# EAGLE board fonteV2 (EAGLE 9.6.2)
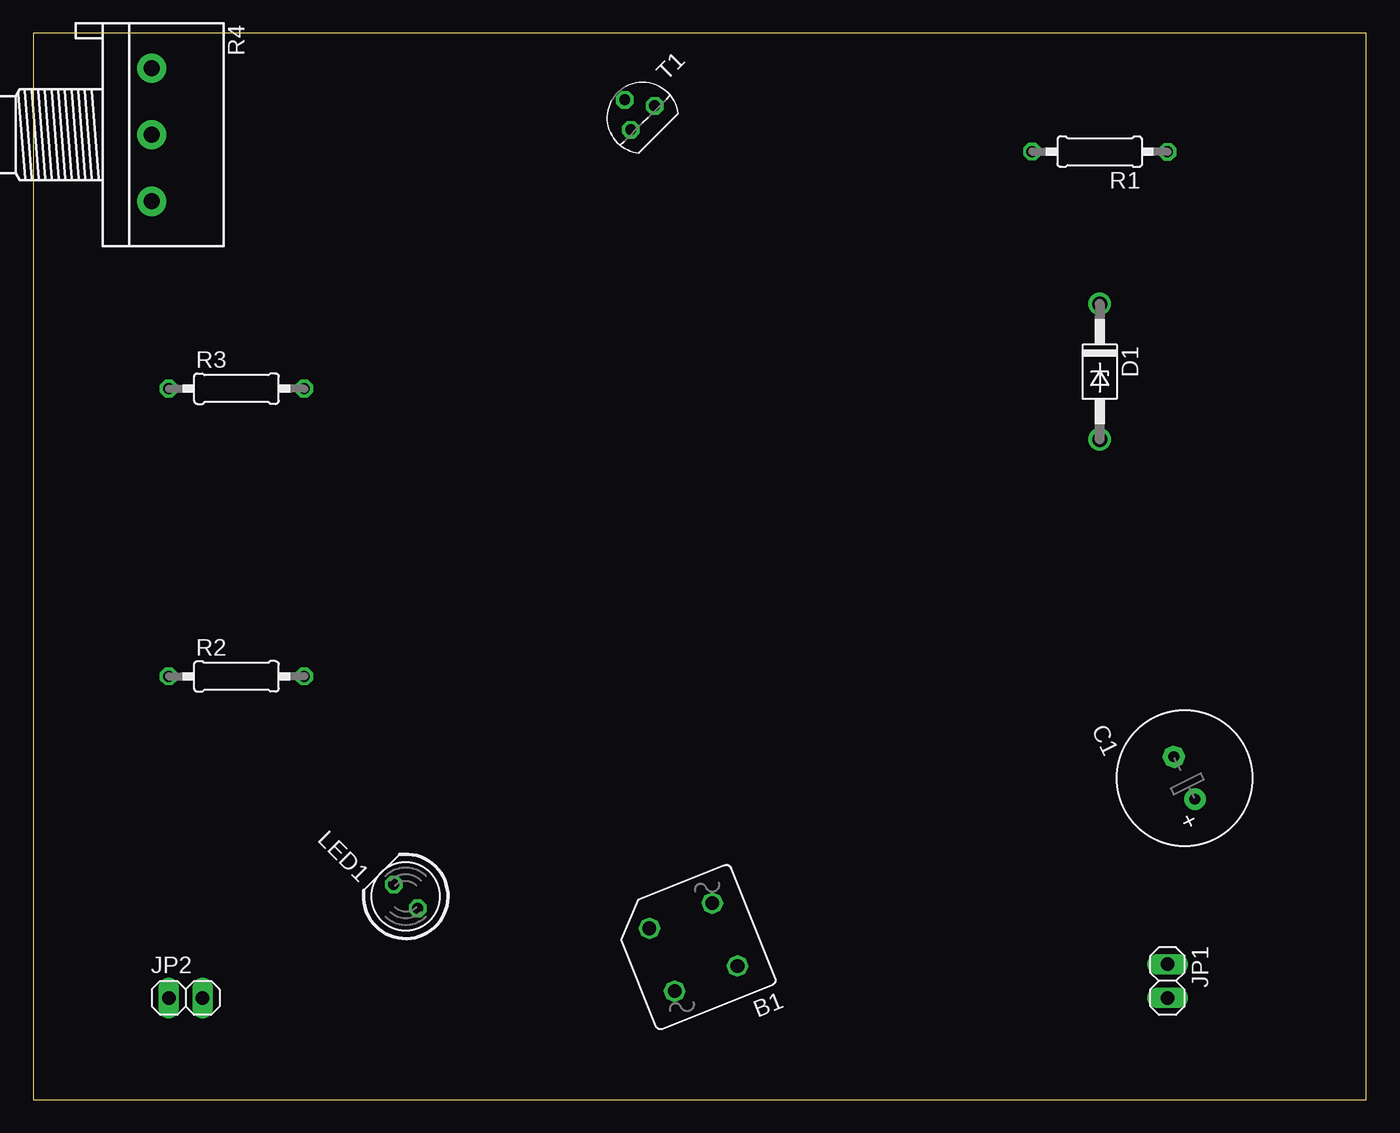
[diagram p0: board, top side]
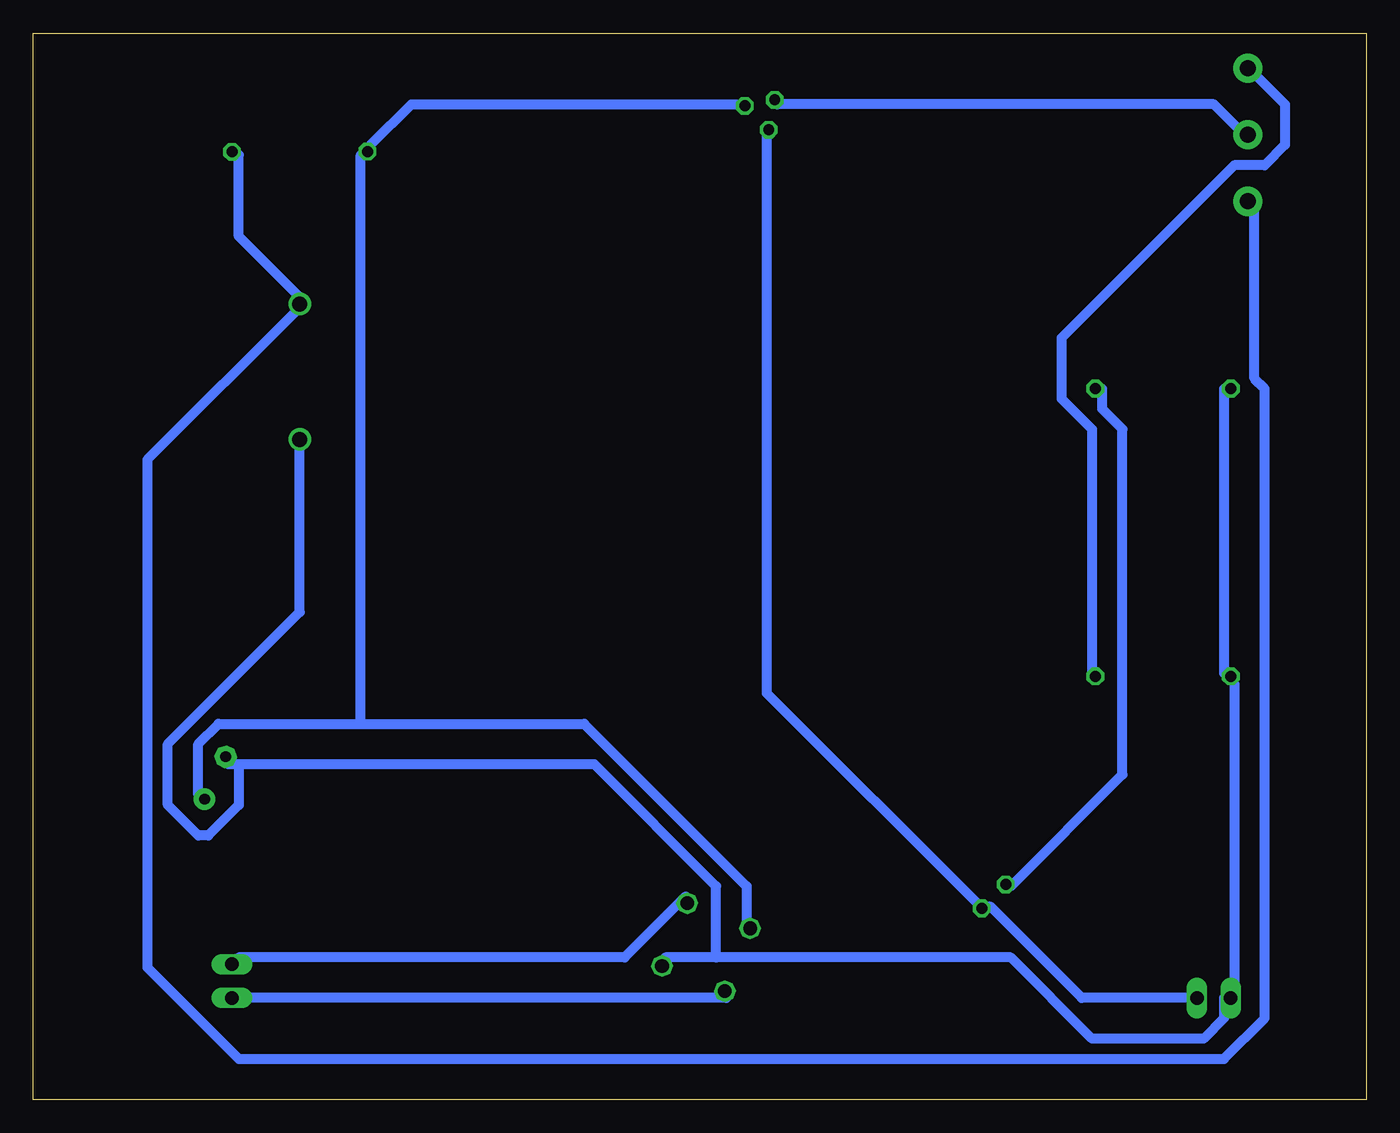
[diagram p1: board, bottom side, seen from below]

Size 100 x 80 mm. Coordinates in mm from the lower left corner, seen from the top.
Outline: 0,0 100,0 100,80 0,80 0,0
Copper layers (1*16): Top 0.035mm / dielectric 1.5mm / Bottom 0.035mm
Design rules "default *": minimum track width 30mil, minimum drill 0.35mm, track to track 30mil, track to pad 30mil, pad to pad 30mil, via to via 30mil, smd to smd 6mil, copper to edge 15mil, drill to drill 6mil, minimum pad ring 10mil, minimum via ring 8mil, stop-mask expansion 4mil, vias tented up to drill 0mil, thermal gap 10mil

## Footprints (pad centres in the part's own frame; a part is rotated, then mirrored left to right if it is on the bottom)
1KAB = drill 1.016 octagon: + 2.54,-2.54; - -2.54,2.54; AC1 -2.54,-2.54; AC2 2.54,2.54
E3,5-10 = drill 0.813 pad 1.6: + -1.778,0 | drill 0.813 pad 1.6 octagon: - 1.778,0
DO41Z10 = drill 1.118: A 5.08,0; C -5.08,0
1X02 = drill 1.016 long: 1 -1.27,0; 2 1.27,0
LED5MM = drill 0.813 octagon: A -1.27,0; K 1.27,0
0207/10 = drill 0.813 octagon: 1 -5.08,0; 2 5.08,0
3RP/1610N = drill 1.2 pad 2.184: 1 -5,0; 2 0,0; 3 5,0
TO92 = drill 0.813 octagon: 1 1.27,0; 2 0,1.905; 3 -1.27,0

## Placement (x,y rotation side)
B1  [1KAB]  49.53,11.43 201.8 top
C1  [E3,5-10]  86.36,24.13 116.5 top
D1  1N4728  [DO41Z10]  80.01,54.61 270 top
JP1  [1X02]  85.09,8.89 270 top
JP2  [1X02]  11.43,7.62 0 top
LED1  [LED5MM]  27.94,15.24 135 top
R1  [0207/10]  80.01,71.12 179.9 top
R2  [0207/10]  15.24,31.75 0 top
R3  [0207/10]  15.24,53.34 0 top
R4  [3RP/1610N]  8.89,72.39 270 top
T1  2N3904  [TO92]  45.72,73.66 45 top

## Library data of the parts
B1 = rectifier
C1 = rcl; SPICEPREFIX: C
D1 = diode
JP1 JP2 = pinhead
LED1 = led
R1-R3 = rcl; SPICEPREFIX: R
R4 = pot
T1 = transistor

## Nets
N$1: R2.2 R4.1
N$2: B1.AC2 JP1.2
N$3: B1.AC1 JP1.1
N$4: B1.+ C1.+ R1.2 T1.1
N$5: B1.- C1.- D1.A JP2.1 R2.1 R3.1
N$6: D1.C R1.1 R4.3
N$7: R4.2 T1.2
N$8: JP2.2 LED1.A T1.3
N$9: LED1.K R3.2

## Tracks (layer width: path | path; a pad name or v marks a point on that pad's centre or on a via)
N$1
  Bottom 0.762: R2.2 20.57,32 20.57,50.29 22.86,52.58 22.86,57.15 9.91,70.1 7.62,70.1 6.1,71.63 6.1,74.68 8.38,76.96 R4.1
N$2
  Bottom 0.762: JP1.2 48.01,7.62 B1.AC2
N$3
  Bottom 0.762: JP1.1 84.58,10.67 55.63,10.67 51.05,15.24 B1.AC1
N$4
  Bottom 0.762: T1.1 47.24,74.68 71.63,74.68 74.68,71.63 R1.2 75.44,70.87 75.44,28.19 | 75.44,28.19 86.11,28.19 87.63,26.67 87.63,22.86 C1.+ | 75.44,28.19 58.67,28.19 46.48,16 46.48,12.95 B1.+
N$5
  Bottom 0.762: R3.1 10.67,53.34 10.67,32 R2.1 9.91,31.24 9.91,7.62 JP2.1 10.67,7.62 10.67,6.1 12.19,4.57 20.57,4.57 26.67,10.67 48.77,10.67 | 48.77,10.67 52.58,10.67 B1.- | 84.58,25.15 57.91,25.15 48.77,16 48.77,10.67 | 84.58,25.15 85.34,25.15 C1.- | D1.A 80.01,36.58 89.92,26.67 89.92,22.1 87.63,19.81 86.87,19.81 84.58,22.1 84.58,25.15
N$6
  Bottom 0.762: R1.1 84.58,70.87 84.58,64.77 80.01,60.2 D1.C 80.01,59.44 91.44,48.01 91.44,9.91 84.58,3.05 10.67,3.05 7.62,6.1 7.62,53.34 8.38,54.1 8.38,67.06 R4.3
N$7
  Bottom 0.762: T1.2 44.2,74.68 11.43,74.68 9.14,72.39 R4.2
N$8
  Bottom 0.762: JP2.2 21.34,7.62 28.19,14.48 LED1.A 28.96,14.48 44.96,30.48 44.96,72.39 T1.3
N$9
  Bottom 0.762: R3.2 19.81,53.34 19.81,51.82 18.29,50.29 18.29,24.38 26.67,16 LED1.K